# Altium PCB ums.PcbDoc (part 2 of 2)
Units mm, origin at the board's own origin, x right, y up, seen from the top; angles counter-clockwise.
Board outline 30 x 30 mm, 6 copper layers (Top, POWER, INNER_TOP, INNER_BOTTOM, GROUND, Bottom), stack 1.545 mm thick; 182 components, 122 nets, 559 pads, 122 vias.
Unrouted connection lines stored in the file: 144.
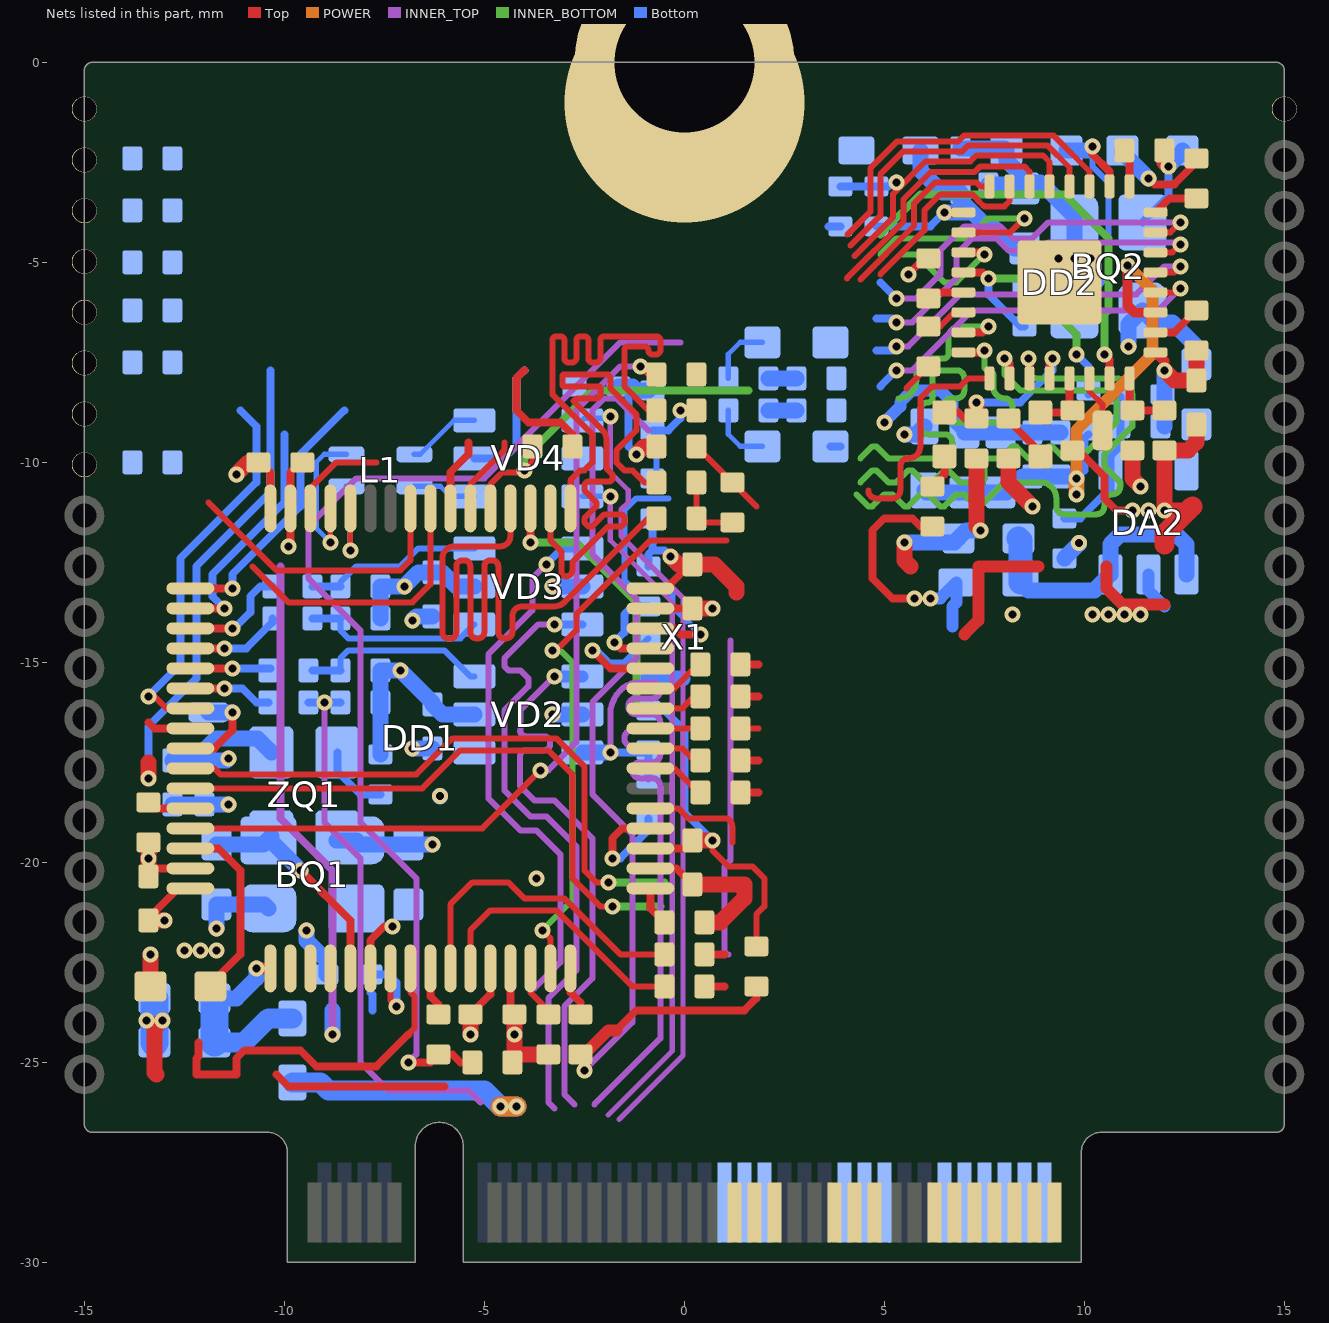
[diagram p6: the nets of this part, all layers, seen from the top]

## Via types
v1: diameter 0.4, hole 0.2, Top to Bottom, tented both sides, 121 vias
v2: diameter 0/0/0/0/0/6 (per signal layer), hole 0, Top to Bottom, 1 vias

## Nets (pads, with @x,y where several pads share a name; then routed paths per layer and width w, separated by ;. In a path a pad name is that pad's centre, name@x,y a point inside that pad or via, vN(x,y) a via of type N, cw(c..) or ccw(c..) an arc to the next point about the centre after c; other vN are vias at no path point)
1V0: C27.1 C28.2 C29.1 DA2.5 DD2.1 R68.1 R69.2 | length 3.6
  Top w0.25: DD2.1@11.78,-7.25 12,-7.47 v1(12,-7.7)
  Top w0.4: v1(12,-7.7) 12.25,-7.95 C28.2@12.8,-7.95 R69.2@12.8,-7.2
  Bottom w0.4: R68.1@12,-9.1 v1(12,-7.7)
1V0_FB: C27.2 DA2.4 R66.2 R68.2 | length 3.9
  Bottom w0.2: R66.2@9.5,-11.4 9.9,-11.4 10.65,-10.65 DA2.4@10.65,-10.2 10.65,-9.85 10.9,-9.6 R68.2@10.9,-9.1 10.9,-8.7 10.9,-8.35 C27.2@10.85,-8.3
3V3_FOR_1V: C26.1 DA2.1 DA2.3 L3.2 | length 7.2
  Bottom w0.4: L3.2@8.4,-13 8.6,-13.2 10.25,-13.2 DA2.3@10.65,-12.8 10.65,-12.05 10.9,-11.8 12.3,-11.8 12.55,-12.05 DA2.1@12.55,-12.8
  Bottom w0.6: C26.1@8.35,-11.9 8.4,-11.95 L3.2@8.4,-13
5V_EXT: TP2.1 VD1.2 X1.3 X1.4 X1.33 X1.34
12V_EXT: TP1.1 X1.22 X1.23
+3V3: C4.1 C37.2 C38.2 DA1.2 DA1.4 DD3.8 L2.2 L3.1 L4.2 L5.2 R3.2 R5.1 R8.2 R9.2 R45.1 R61.1 R78.2 R80.2 TP11.1 VD7.5 | length 18.2
  Top w0.2: v1(5.6,-5.3) 6,-4.9 R61.1@6.1,-4.9 ; v1(5.75,-13.4) 5.2,-13.4 4.7,-12.9 4.7,-11.7 5,-11.4 5.7,-11.4 5.9,-11.6 R9.2@6.2,-11.6
  Top w0.3: 10.55,-12.6 10.55,-13.15 10.95,-13.55 12,-13.55
  Top w0.4: R8.2@8.1,-9.9 8.1,-10.5 v1(8.7,-11.1) ; R45.1@11.2,-9.7 11.2,-10.4 v1(11.4,-10.6)
  INNER_BOTTOM w0.3: v1@6.143,-13.366 v1@6.153,-13.357
  POWER w0.5: v1(-4.6,-26.1) v1(-4.2,-26.1)
  Bottom w0.3: v1(6.15,-13.4) 6.4,-13.4 L3.1@6.8,-13 6.8,-13.5 6.7,-13.6 6.7,-14.1
  Bottom w0.4: v1(5.5,-9.3) 5.8,-9.3 L5.2@6,-9.1
  Bottom w0.5: L2.2@-9.8,-25.5 -9.1,-25.5 -8.9,-25.7 -5,-25.7 v1(-4.6,-26.1) v1(-4.2,-26.1)
  other v1: 10.2,-13.8 10.6,-13.8 11,-13.8 11.4,-13.8
+3V3MCU: C6.2 C7.2 C8.2 C9.1 C12.1 C13.2 C14.2 C17.2 C18.2 C19.2 C20.2 C21.2 DD1.1 DD1.13 DD1.19 DD1.32 DD1.48 DD1.64 L2.1 R6.2 R7.2 R11.2 R15.2 R16.2 R17.2 R18.2 R22.2 R27.2 R29.2 R37.2 R38.1 R47.1 TP34.1 VD2.5 VD3.5 VD4.5 ZQ1.4 | length 39.8
  Top w0.15: v1(0.7,-19.45) 0.7,-19.7 1.1,-20.1 1.7,-20.1 2,-20.4 2,-21.1 1.8,-21.3 R16.2@1.8,-22.1
  Top w0.2: C13.2@-13.4,-21.45 -13.4,-21.4 -12.65,-20.65 DD1.64@-12.35,-20.65 ; C19.2@-10.65,-10 -10.6,-10 -10.35,-10.25 DD1.48@-10.35,-11.15 ; DD1.13@-4.35,-22.65 -4.35,-23.7 C14.2@-4.25,-23.8 ; R18.2@-4.25,-24.95 R18.2@-4.1,-24.8 ; DD1.19@-0.85,-19.65 0,-19.65 C17.2@0.2,-19.45 ; DD1.32@-0.85,-13.15 -0.45,-13.15 0.15,-12.55 C18.2@0.2,-12.55
  Top w0.3: v1(-10.7,-22.65) DD1.1@-10.35,-22.65
  Top w0.4: C13.2@-13.4,-21.45 v1(-13,-21.45) ; v1(-11.2,-10.3) -10.9,-10 C19.2@-10.65,-10 ; R18.2@-4.3,-25 -4.25,-24.95 v1(-4.25,-24.3) C14.2@-4.25,-23.8 ; R18.2@-4.1,-24.8 R29.2@-3.4,-24.8 ; v1(-0.35,-12.35) -0.15,-12.55 C18.2@0.2,-12.55 0.75,-12.55 1.3,-13.1 1.3,-13.25 ; C17.2@0.2,-19.45 v1(0.7,-19.45)
  Bottom w0.2: R11.2@-0.9,-16.2 -0.5,-16.2 0,-16.7 0,-18.75 v1(0.7,-19.45) ; R27.2@-0.9,-12.6 -0.9,-12.3 -0.8,-12.2 ; R47.1@-0.8,-11.4 -0.8,-12.2 ; v1(-0.35,-12.35) -0.5,-12.2 -0.8,-12.2
  Bottom w0.4: R6.2@-16.2,2.1 R7.2@-15.2,2.1 ; C21.2@-12.8,-17.45 C20.2@-12,-17.45 ; C9.1@-11.75,-23.4 -11.2,-23.4 -10.7,-22.9 v1(-10.7,-22.65) ; v1(-11.4,-17.4) -11.45,-17.45 C20.2@-12,-17.45 ; ZQ1.4@-10.325,-17.25 -10.675,-16.9 -11.7,-16.9 -12,-17.2 C20.2@-12,-17.45 ; R38.1@-7.6,-17.3 R37.2@-7.6,-16 R22.2@-7.6,-15.2 v1(-7.1,-15.2) -6.3,-16 C6.2@-6.3,-16.05 -6.05,-16.3 VD2.5@-5.25,-16.3 ; R17.2@-7.6,-13.9 R15.2@-7.6,-13.1 v1(-7,-13.1) -6.65,-12.75 C7.2@-6.3,-12.75 -6.05,-12.75 -5.7,-13.1 VD3.5@-5.25,-13.1
  Bottom w0.5: C12.1@-11.75,-24.5 -11,-24.5 -10.4,-23.9 L2.1@-9.8,-23.9
  Bottom w0.7: C12.1@-11.75,-24.5 C9.1@-11.75,-23.4
  other v1: -12.5,-22.2 -12.1,-22.2 -11.7,-22.2
BOOT0: DD1.60 R34.2 | length 1.1
  Top w0.2: R34.2@-13.4,-18.5 -13.25,-18.65 DD1.60@-12.35,-18.65
BOOT1: DD1.28 R35.2 | length 3.4
  Top w0.2: v1(-2.3,-14.7) -1.85,-15.15 DD1.28@-0.85,-15.15
  Bottom w0.15: v1(-2.3,-14.7) -2.25,-14.75 -2.121,-14.75 -1.871,-15 -1.5,-15 R35.2@-0.9,-14.4
CLK: R15.1 R30.2 TP8.1 VD3.1 VD3.6 X1.6 | length 18
  INNER_TOP w0.15: -3.75,-23.15 -3.1,-22.5 -3.1,-19.8 -3.7,-19.2 -4.1,-19.2 -4.9,-18.4 -4.9,-14.8 -3.8,-13.7 -3.8,-12.9 v1(-3.45,-12.55)
  Bottom w0.15: R15.1@-8.6,-13.1 -8.6,-13 -8.2,-12.6 -7.1,-12.6 -6.65,-12.15 VD3.6@-5.25,-12.15
  Bottom w0.2: R30.2@-9.3,-13.1 R15.1@-8.6,-13.1 ; v1(-3.45,-12.55) -3.05,-12.15 VD3.1@-2.55,-12.15
CLK_R: DD1.51 R30.1 | length 2.7
  Top w0.2: DD1.51@-12.35,-14.15 v1(-11.3,-14.15)
  Bottom w0.2: v1(-11.3,-14.15) -11.25,-14.15 -10.85,-13.75 -10.85,-13.35 -10.6,-13.1 R30.1@-10.3,-13.1
D_N: L1.1 VD4.1 VD4.6 X1.11 | length 19.1
  INNER_TOP w0.13: -1.9,-26.318 -0.3,-24.718 -0.3,-13.5 -1.85,-11.95 v1(-1.85,-10.85)
  Bottom w0.13: L1.1@-6.75,-10.6 -6.1,-10.6 -5.85,-10.85 VD4.1@-5.25,-10.85 ; VD4.6@-2.55,-10.85 v1(-1.85,-10.85)
D_P: L1.4 VD4.3 VD4.4 X1.12 | length 21.7
  INNER_TOP w0.13: v1(-1.85,-8.85) -1.85,-10.25 -1.4,-10.7 -1.4,-11 -1.58,-11.18 -1.58,-11.838 -0.03,-13.388 -0.03,-24.83 -1.63,-26.43
  Bottom w0.13: L1.4@-6.75,-9.8 -6.6,-9.8 -5.75,-8.95 VD4.3@-5.25,-8.95 ; VD4.4@-2.55,-8.95 -2.5,-8.9 -1.9,-8.9 v1(-1.85,-8.85)
GND: BQ1.2 BQ1.4 BQ2.2 BQ2.4 C1.2 C2.1 C3.1 C4.2 C5.1 C6.1 C7.1 C8.1 C9.2 C10.1 C11.2 C12.2 C13.1 C14.1 C15.2 C16.1 C17.1 C18.1 C19.1 C20.1 C21.1 C22.2 C23.2 C26.2 C28.1 C29.2 C30.1 C31.1 C32.1 C33.1 C34.2 C35.2 C36.2 C37.1 C38.1 DA2.2 DD1.12 DD1.18 DD1.31 DD1.47 DD1.63 DD2.33 DD3.5 HL3.2 R2.1 R4.1 R28.2 R34.1 R35.1 R49.1 R50.2 R51.2 R52.2 R53.2 R62.1 R66.1 R67.2 R76.2 R77.2 R79.2 TP3.1 TP5.1 TP7.1 VD2.2 VD3.2 VD4.2 VD5.2 VD6.1 VD7.2 X1.1 X1.2 X1.10 X1.13 X1.20 X1.21 X1.31 X1.32 X1.76 ZQ1.2 | length 66.9
  Top w0.2: C13.1@-13.4,-20.35 -13.2,-20.15 DD1.63@-12.35,-20.15 ; v1(-9.9,-12.1) -9.85,-12.05 DD1.47@-9.85,-11.15 -9.85,-10.25 -9.6,-10 C19.1@-9.55,-10 ; C14.1@-5.35,-23.8 -4.85,-23.3 DD1.12@-4.85,-22.65 ; -4,-7.7 -4.2,-7.9 -4.2,-8.7 -3.9,-9 -3.1,-9 -2.8,-9.3 R49.1@-2.8,-9.6 ; DD1.18@-0.85,-20.15 -0.2,-20.15 C17.1@0.2,-20.55 ; DD1.31@-0.85,-13.65 C18.1@0.2,-13.65 ; R76.2@9.7,-9.7 9.85,-9.7 10.5,-10.35 10.5,-10.9 10.8,-11.2 v1(11.2,-11.2) ; v1(11.6,-2.9) 11.75,-3.05 12.25,-3.05 12.8,-2.5 R62.1@12.8,-2.4
  Top w0.4: C13.1@-13.4,-20.35 v1(-13.4,-19.9) R34.1@-13.4,-19.5 ; C11.2@-13.35,-23.1 v1(-13.35,-22.3) ; -13.2,-25.3 -13.25,-25.25 -13.25,-24.5 -13.25,-24.15 v1(-13.05,-23.95) ; v1(-5.35,-24.3) C14.1@-5.35,-23.8 ; v1(-1.2,-9.8) -1,-9.6 R77.2@-0.7,-9.6 ; C17.1@0.2,-20.5 0.25,-20.55 1.5,-20.55 1.5,-20.9 0.9,-21.5 R28.2@0.5,-21.5 ; C18.1@0.2,-13.65 v1(0.7,-13.65) ; v1(5.5,-12) 5.5,-12.45 5.65,-12.6 ; R67.2@7.3,-9.9 7.3,-11.6 v1(7.4,-11.7) ; 12.7,-11.1 cw(c12.6,-11.1) 12.6,-11.2 v1(12,-11.2) R50.2@12,-9.7 12.6,-9.7 12.8,-9.5 C28.1@12.8,-9.05
  Top w0.5: 12,-12.05 12,-11.8 12.6,-11.2 12.7,-11.1
  Bottom w0.2: VD4.2@-5.25,-9.9 -4.5,-9.9 -4.2,-9.6 -4.2,-7.9 -4,-7.7 ; C8.1@-1.4,-8.1 -1.4,-9.6 v1(-1.2,-9.8) ; 3.6,-4.1 R53.2@3.9,-4.1 ; R51.2@8.5,-5.6 8.8,-5.3 9,-5.3 9.35,-4.95 v1(9.35,-4.9)
  Bottom w0.3: v1(5,-9) 5.4,-8.6 5.4,-8.5 5.7,-8.2 6.4,-8.2 6.7,-8.5 6.7,-8.95 C36.2@7,-9.25 ; DA2.2@11.6,-12.8 11.6,-13.2 12,-13.6
  Bottom w0.4: C21.1@-12.8,-18.55 v1(-11.4,-18.55) ; v1(-11.699,-21.651) -11.7,-21.65 C15.2@-11.7,-21.05 -10.5,-21.05 BQ1.2@-10.4,-21.15 ; v1(-9.45,-21.7) -9.45,-21.95 -8.95,-22.45 C16.1@-8.95,-22.8 ; BQ1.4@-8.7,-19.45 BQ1.4@-8.2,-19.45 ; BQ1.4@-8.45,-19.45 BQ1.4@-8.2,-19.45 ; v1(-6.8,-17.15) C6.1@-6.3,-17.15 ; v1(-6.8,-13.95) -6.7,-13.85 C7.1@-6.3,-13.85 ; v1(-6.299,-19.553) -6.302,-19.55 -8.1,-19.55 BQ1.4@-8.2,-19.45 ; v1(-6.114,-18.339) v1@-6.103,-18.35 ; v1(-3.3,-16.3) VD2.2@-2.55,-16.3 ; v1(-3.3,-13.1) VD3.2@-2.55,-13.1 ; C8.1@-1.65,-8.1 -1.3,-8.1 -1.2,-8.2 R52.2@-0.9,-8.2 ; R35.1@-0.9,-15.4 -0.05,-15.4 ; v1(5.5,-12) 6.75,-12 C26.2@6.85,-11.9 7.05,-11.7 v1(7.4,-11.7) ; C31.1@6.9,-2.15 8,-2.15 C23.2@8.05,-2.2 8.05,-2.45 8.6,-3 8.9,-3 9.75,-3.85 BQ2.4@9.75,-4 9.75,-4.85 v1@9.8,-4.9 ; C36.2@7,-9.25 C34.2@7.9,-9.25 C30.1@9.4,-9.25 ; C33.1@7.6,-3.05 8.4,-3.05 C35.2@8.5,-3.15 ; R66.1@9.5,-12.4 9.864,-12.036 v1(9.864,-12.023) ; C22.2@10.95,-2.2 10.95,-2.25 v1(11.6,-2.9) ; v1(11.1,-7.1) 11.1,-6.55 BQ2.2@11.45,-6.2 11.75,-6.5 12.2,-6.5 12.8,-7.1 C29.2@12.8,-7.5
  Bottom w0.7: C12.2@-13.25,-24.5 -13.25,-23.95 C9.2@-13.25,-23.4
  other v1: -13.45,-23.95 -3.7,-20.4 11.6,-11.2 9.75,-4.9 10.15,-4.9
  other v2: 0,-1
GPIO1: DD2.32 R45.2 R50.1 | length 1.6
  Top w0.2: DD2.32@11.13,-7.9 11.13,-8.63 R45.2@11.2,-8.7 R50.1@12,-8.7
JTCK: DD1.49 R40.2 | length 6.7
  Top w0.2: DD1.49@-12.35,-13.15 v1(-11.3,-13.15) v1@-11.25,-13.15
  Bottom w0.2: v1(-11.3,-13.15) -11.3,-12.8 -9.6,-11.1 -9.6,-9.8 -8.5,-8.7
JTCK_R: R40.1 TP30.1
JTDI: DD1.50 R41.2 | length 6.1
  Top w0.2: DD1.50@-12.35,-13.65 v1(-11.5,-13.65) v1@-11.45,-13.65
  Bottom w0.2: v1(-11.5,-13.65) -11.8,-13.35 -11.8,-12.8 -10,-11 -10,-9.3
JTDI_R: R41.1 TP31.1
JTDO: DD1.55 R42.2 | length 9.6
  Top w0.15: v1(-13.4,-15.85) -13.25,-15.85 -12.95,-16.15 DD1.55@-12.35,-16.15
  Bottom w0.2: v1(-13.4,-15.85) -12.6,-15.05 -12.6,-12.4 -10.7,-10.5 -10.7,-9.1 -11.1,-8.7
JTDO_R: R42.1 TP32.1
JTMS: DD1.46 R39.2 | length 2.4
  Top w0.15: DD1.46@-9.35,-11.15 -9.35,-10.65 -8.7,-10 -7.7,-10
JTMS_R: R39.1 TP29.1
LED0: DD1.40 HL1.2 | length 7.1
  Top w0.15: HL1.2@-16.2,1.9 HL1.2@-16.2,2.05 ; -10.8,-12.6 -9.9,-13.5 -6.8,-13.5 -6.35,-13.05 DD1.40@-6.35,-11.15
LED0_R: HL1.1 R6.1 | length 0.7
  Top w0.4: v1(-16.2,2.75) HL1.1@-16.2,3.15
  Bottom w0.4: v1(-16.2,2.75) R6.1@-16.2,3.1
LED1: DD1.41 HL2.2 | length 7.2
  Top w0.15: -11.9,-11 -10.7,-12.2 -10.2,-12.7 -7.1,-12.7 -6.85,-12.45 DD1.41@-6.85,-11.15
LED1_R: HL2.1 R7.1 | length 0.7
  Top w0.4: v1(-15.2,2.75) HL2.1@-15.2,3.15
  Bottom w0.4: v1(-15.2,2.75) R7.1@-15.2,3.1
LED_G: DD2.29 HL4.2 R76.1 | length 1.6
  Top w0.2: HL4.2@8.9,-8.75 9.65,-8.75 R76.1@9.7,-8.7 9.63,-8.63 DD2.29@9.63,-7.9
LED_Y: DD2.28 HL5.2 R67.1 | length 4.3
  Top w0.2: HL5.2@6.5,-8.75 6.85,-8.75 7,-8.9 R67.1@7.3,-8.9 ; DD2.28@9.13,-7.9 9.13,-7.47 v1(9.2,-7.4)
  Top w0.4: R67.1@7.3,-8.9 v1(7.3,-8.5)
  Bottom w0.2: v1(7.3,-8.5) 8.4,-8.5 9.2,-7.7 v1(9.2,-7.4)
LEDG_R: HL4.1 R8.1 | length 1.3
  Top w0.2: R8.1@8.1,-8.9 8.1,-8.95 8.9,-9.75 HL4.1@8.9,-9.85
LEDY_R: HL5.1 R9.1 | length 0.9
  Top w0.2: R9.1@6.2,-10.6 6.5,-10.3 HL5.1@6.5,-9.85
MCU_OSC_IN: BQ1.3 C15.1 DD1.5 TP19.1 ZQ1.3 | length 5.6
  Top w0.2: v1(-9.599,-20.201) -8.35,-21.45 DD1.5@-8.35,-22.65
  Bottom w0.4: C15.1@-11.7,-19.55 -10.525,-19.55 ZQ1.3@-10.325,-19.35 -10.325,-19.475 v1(-9.599,-20.201)
MCU_OSC_OUT: BQ1.1 C10.2 DD1.6 | length 1.4
  Top w0.2: DD1.6@-7.85,-22.65 -7.85,-21.95 -7.5,-21.6 -7.3,-21.6 v1(-7.299,-21.601)
MCU_RST: C16.2 DD1.7 R44.2 | length 3.3
  Top w0.15: DD1.7@-7.35,-22.65 -7.35,-23.45 v1(-7.2,-23.6)
  Bottom w0.2: -7.8,-23.7 -7.8,-23.3 -7.85,-23.25 C16.2@-7.85,-22.8 -7.4,-22.8 -7.2,-23 v1(-7.2,-23.6)
MCU_RST_R: R44.1 TP35.1 | length 12.8
  INNER_TOP w0.2: -10.1,-12.6 -10.1,-18.9 -8.8,-20.2 v1(-8.8,-24.3)
  Bottom w0.4: v1(-8.8,-24.3) -8.8,-23.7
MCURXD0: DD1.24 R13.1 | length 1.2
  Top w0.15: DD1.24@-0.85,-17.15 -0.05,-17.15 R13.1@0.25,-17.45
MCURXD1: DD1.25 R19.1 | length 1.3
  Top w0.15: DD1.25@-0.85,-16.65 R19.1@0.4,-16.65
MCURXD2: DD1.26 R14.1 | length 1.4
  Top w0.15: DD1.26@-0.85,-16.15 -0.05,-16.15 0.25,-15.85 R14.1@0.4,-15.85
MCURXD3: DD1.27 R20.1 | length 1.5
  Top w0.15: DD1.27@-0.85,-15.65 -0.25,-15.65 0.35,-15.05 R20.1@0.4,-15.05
MCURXDV: DD1.23 R21.1 | length 1.5
  Top w0.15: DD1.23@-0.9,-17.65 -0.25,-17.65 R21.1@0.35,-18.25
MDC: DD2.12 R18.1 R24.2 TP15.1 | length 35.4
  Top w0.15: 4.151,-4.585 4.9,-3.836 4.9,-2.8 5.475,-2.225 6.95,-2.225 7.1,-2.075 9.075,-2.075 9.63,-2.63 DD2.12@9.63,-3.1
  Top w0.2: v1(-6.9,-25) -6.35,-25 R24.2@-6.15,-24.8 -5.8,-24.8 -5.6,-25 R18.1@-5.3,-25
  INNER_TOP w0.15: v1(-6.9,-25) -6.7,-24.8 -6.7,-20.4 -8.1,-19 -8.1,-14.2 -9.4,-12.9 -9.4,-11.6 -8.2,-10.4 -5,-10.4 -1.6,-7 -0.1,-7
MDC_R: DD1.9 R24.1 | length 1.2
  Top w0.2: DD1.9@-6.35,-22.65 -6.35,-23.35 -6.15,-23.55 R24.1@-6.15,-23.8
MDIO: DD2.11 R16.1 R31.2 TP14.1 | length 34.4
  Top w0.15: 4.083,-4.3 4.65,-3.733 4.65,-2.65 5.325,-1.975 6.846,-1.975 6.996,-1.825 9.225,-1.825 10.13,-2.73 DD2.11@10.13,-3.1
  Top w0.2: R31.2@-2.6,-24.8 R31.2@-2.5,-24.9 ; -1.7,-24.2 -1.2,-23.7 1.5,-23.7 1.8,-23.4 R16.1@1.8,-23.1
  Top w0.3: R31.2@-2.6,-24.8 -2.5,-24.8 -1.9,-24.2 -1.7,-24.2 ; v1(-2.5,-25.2) R31.2@-2.5,-24.9
  INNER_TOP w0.15: v1(-2.5,-25.2) -1.3,-24 -1.3,-19.3 -2.3,-18.3 -2.3,-16 -1.2,-14.9 -1.2,-13.4 -2.3,-12.3 -2.3,-8.7 -2,-8.4 -1.7,-8.4 -0.9,-9.2
MDIO_R: DD1.16 R31.1 | length 1.3
  Top w0.2: DD1.16@-2.85,-22.65 -2.85,-23.25 -2.6,-23.5 R31.1@-2.6,-23.8
MISO: R17.1 R32.2 TP4.1 VD3.3 VD3.4 X1.7 | length 20.1
  INNER_TOP w0.15: -3.25,-26.15 -3.4,-26 -3.4,-23.4 -2.7,-22.7 -2.7,-19.6 -3.45,-18.85 -3.85,-18.85 -4.5,-18.2 -4.5,-16.2 -3.9,-15.6 -3.9,-15.4 -4.1,-15.2 -4.4,-15.2 -4.5,-15.1 -4.5,-14.9 -3.65,-14.05 v1(-3.25,-14.05)
  Bottom w0.15: R17.1@-8.6,-13.9 -8.6,-14.2 -8.4,-14.4 -5.6,-14.4 VD3.4@-5.25,-14.05
  Bottom w0.2: R32.2@-9.3,-13.9 R17.1@-8.6,-13.9 ; v1(-3.25,-14.05) VD3.3@-2.55,-14.05
MISO_R: DD1.52 R32.1 | length 2.4
  Top w0.2: DD1.52@-12.35,-14.65 v1(-11.5,-14.65)
  Bottom w0.2: v1(-11.5,-14.65) -10.95,-14.65 -10.3,-14 R32.1@-10.3,-13.9
MOSI: R22.1 R25.2 TP6.1 VD2.1 VD2.6 X1.8 | length 19.1
  INNER_TOP w0.15: v1(-3.25,-15.35) -4.1,-16.2 -4.1,-16.694 -4.106,-16.7 ccw(c-3.956,-16.7) -3.956,-16.85 -3.506,-16.85 cw(c-3.506,-17) -3.356,-17 -3.356,-17.05 cw(c-3.506,-17.05) -3.506,-17.2 -3.956,-17.2 ccw(c-3.956,-17.35) -4.106,-17.35 -4.106,-18.094 -3.75,-18.45 -3.25,-18.45 -2.3,-19.4 -2.3,-22.9 -3,-23.6 -3,-25.8 -2.75,-26.05
  Bottom w0.15: R22.1@-8.6,-15.2 -8.6,-14.9 -8.4,-14.7 -6,-14.7 -5.35,-15.35 VD2.6@-5.25,-15.35
  Bottom w0.2: R25.2@-9.3,-15.2 R22.1@-8.6,-15.2
  Bottom w0.3: v1(-3.25,-15.35) VD2.1@-2.55,-15.35
MOSI_R: DD1.53 R25.1 | length 2
  Top w0.2: DD1.53@-12.35,-15.15 v1(-11.3,-15.15)
  Bottom w0.2: v1(-11.3,-15.15) R25.1@-10.35,-15.15
N_MID: R72.2 R75.1 | length 0.7
  Bottom w0.4: R75.1@2.1,-7.9 R72.2@2.8,-7.9
NJTRST: DD1.56 R43.2 | length 1.1
  Top w0.2: -13.4,-16.5 -13.25,-16.65 DD1.56@-12.35,-16.65
NJTRST_R: R43.1 TP33.1 | length 11.9
  Top w0.4: v1(-13.4,-17.9) -13.4,-17.5
  Bottom w0.2: v1(-13.4,-17.9) -13.4,-16.6 -12.2,-15.4 -12.2,-12.6 -10.35,-10.75 -10.35,-7.7
P_MID: R71.2 R74.1 | length 0.7
  Bottom w0.4: R74.1@2.1,-8.7 R71.2@2.8,-8.7
PHY_ADR1: DD2.20 R46.2 R51.1 | length 6.7
  Top w0.2: DD2.20@6.98,-5.25 7.45,-5.25 v1(7.6,-5.4)
  INNER_BOTTOM w0.2: v1(7.6,-5.4) 8.4,-5.4 9.8,-6.8 v1(9.8,-7.3)
  Bottom w0.2: v1(7.6,-5.4) 7.6,-5.8 8.4,-6.6 R51.1@8.5,-6.6 ; v1(9.8,-7.3) 10.1,-7.6 R46.2@10.1,-8.3
PHY_CEXT: DD2.2 R69.1 | length 1.2
  Top w0.2: DD2.2@11.78,-6.75 12.25,-6.75 R69.1@12.8,-6.2
PHY_GPIO2: DD2.8 R62.2 | length 1.2
  Top w0.2: DD2.8@11.78,-3.75 12.13,-3.4 R62.2@12.8,-3.4
PHY_PWDN: DD2.21 R61.2 | length 0.9
  Top w0.2: R61.2@6.1,-5.9 6.25,-5.75 DD2.21@6.98,-5.75
PHY_RXC: DD2.19 R57.2 | length 3.7
  Top w0.2: R57.2@0.5,-23.1 1,-23.1 ; DD2.19@6.98,-4.75 7.45,-4.75 v1(7.5,-4.8)
  INNER_BOTTOM w0.15: 5.4,-4.8 5.8,-4.8 6.5,-5.5 6.8,-5.5 v1(7.5,-4.8)
PHY_RXD0: DD2.16 R47.2 R52.1 R59.2 | length 7.1
  Top w0.15: R59.2@0.3,-8.7 R59.2@0.4,-8.7 ; 4.4,-5.432 5.74,-4.092 5.74,-3.536 6.276,-3 7.3,-3 7.4,-3.1 DD2.16@7.63,-3.1
  Top w0.2: v1(-0.1,-8.7) R59.2@0.3,-8.7
  Bottom w0.15: R47.2@-0.7,-10.4 R52.1@-0.7,-9.2
  Bottom w0.2: R52.1@-0.8,-9.2 -0.7,-9.2 -0.4,-9.2 -0.1,-8.9
PHY_RXD1: DD2.15 R54.2 R77.1 | length 7
  Top w0.15: R77.1@0.3,-9.6 R54.2@1.2,-10.5 1.8,-11.1 ; 4.9,-5.3 6,-4.2 6,-3.7 6.4,-3.3 7.2,-3.3 7.325,-3.425 7.325,-3.438 7.467,-3.58 7.48,-3.58 7.5,-3.6 8,-3.6 8.13,-3.47 DD2.15@8.13,-3.1
PHY_RXD2: DD2.14 R60.2 | length 15
  Top w0.15: 4.065,-5.4 5.48,-3.985 5.48,-3.428 6.168,-2.74 7.26,-2.74 7.4,-2.6 8.5,-2.6 8.63,-2.73 DD2.14@8.63,-3.1
  Top w0.2: R60.2@0.5,-22.3 1,-22.3
  INNER_TOP w0.15: 1.1,-22.3 1,-22.3 1,-20.1 1.15,-19.95 1.15,-14.45
PHY_RXD3: DD2.13 R48.2 R53.1 R55.2 | length 8.4
  Top w0.15: 4.257,-4.84 5.22,-3.877 5.22,-3.288 6.028,-2.48 7.15,-2.48 7.3,-2.33 8.97,-2.33 9.13,-2.491 DD2.13@9.13,-3.1
  Bottom w0.2: R53.1@3.9,-3.1 5.1,-3.1 v1@5.3,-2.9
  other v1: 5.3,-3
PHY_RXDV: DD2.18 R56.2 | length 5.6
  Top w0.15: DD2.18@6.98,-4.25 8.15,-4.25 v1(8.5,-3.9)
  INNER_BOTTOM w0.15: 4.9,-4.8 5.3,-4.4 7.1,-4.4 7.6,-3.9 v1(8.5,-3.9)
PHY_RXN: DD2.6 R72.1 | length 9.8
  Top w0.15: DD2.6@11.78,-4.75 12.2,-4.75 v1(12.4,-4.55)
  INNER_TOP w0.15: v1(5.3,-6.5) 5.7,-6.5 6.8,-5.4 6.8,-4.8 7.2,-4.4 7.8,-4.4 8.1,-4.7 8.9,-4.7 9.1,-4.5 12.35,-4.5 v1(12.4,-4.55)
  Bottom w0.2: 4.8,-6.4 5.2,-6.4 v1(5.3,-6.5)
PHY_RXP: DD2.5 R71.1 | length 9.2
  Top w0.15: DD2.5@11.78,-5.25 12.25,-5.25 v1(12.4,-5.1)
  INNER_TOP w0.15: v1(5.3,-7.1) 5.6,-7.1 6.9,-5.8 11.3,-5.8 12,-5.1 v1(12.4,-5.1)
  Bottom w0.2: 4.8,-7.2 5.2,-7.2 v1(5.3,-7.1)
PHY_TXC: DD2.22 R58.2 | length 1
  Top w0.15: R58.2@6.1,-6.6 6.4,-6.6 6.75,-6.25 DD2.22@6.98,-6.25
PHY_TXN: DD2.7 R73.1 | length 9.8
  Top w0.15: DD2.7@11.78,-4.25 12.15,-4.25 v1(12.4,-4)
  INNER_TOP w0.15: v1(5.3,-5.9) 5.8,-5.9 6.4,-5.3 6.4,-4.7 7,-4.1 7.9,-4.1 8.2,-4.4 8.7,-4.4 9.1,-4 v1(12.4,-4)
  Bottom w0.2: 4.9,-5.5 v1(5.3,-5.9)
PHY_TXP: DD2.4 R70.1 | length 9.4
  Top w0.15: DD2.4@11.78,-5.75 12.3,-5.75 v1(12.4,-5.65)
  INNER_TOP w0.15: v1(5.3,-7.7) 5.7,-7.7 7.2,-6.2 11.85,-6.2 v1(12.4,-5.65)
  Bottom w0.2: R70.1@3.65,-9.6 R70.1@3.9,-9.6 ; 4.9,-8.1 v1(5.3,-7.7)
PS_ADJ: DA1.1 R3.1 R4.2 | length 3.3
  Top w0.3: 7,-14.3 7.35,-13.95 7.35,-12.6 8.85,-12.6
PS_IN: C1.1 C2.2 DA1.3 R1.2 VD1.1 | length 4.3
  Top w0.2: -10.2,-25.3 -9.9,-25.6 -6,-25.6
PS_LED: HL3.1 R5.2
RS485_A: L6.2 R81.2 X1.29
RS485_A_L: DD3.6 L6.1 R80.1 VD7.1 VD7.6
RS485_B: L7.2 R81.1 X1.30
RS485_B_L: DD3.7 L7.1 R79.1 VD7.3 VD7.4
RST_PHY: DD1.37 DD2.31 R49.2 | length 19
  Top w0.15: DD1.37@-4.85,-11.15 -4.85,-10.55 -4.55,-10.25 -4.05,-10.25 v1(-4,-10.2) -3.8,-10 R49.2@-3.8,-9.6
  Top w0.2: v1(10.5,-7.3) 10.63,-7.43 DD2.31@10.63,-7.9
  INNER_BOTTOM w0.2: v1(-4,-10.2) -4,-9.9 -2.3,-8.2 -1.2,-8.2 1.6,-8.2 ; 4.9,-4.3 5.9,-3.3 9.5,-3.3 10.6,-4.4 10.6,-6.2 10.5,-6.3 v1(10.5,-7.3)
RXC: DD1.15 R58.1 | length 15.3
  Top w0.15: v1@-3.65,-21.75 v1@-3.65,-21.7 ; v1(-3.55,-21.7) -3.35,-21.9 -3.35,-22.05 DD1.15@-3.35,-22.65 ; v1(-3.3,-14.7) -3.2,-14.7 -2.7,-14.2 -2.7,-13.8 -0.85,-11.95 1.05,-11.95 ; 5.55,-8.15 R58.1@6.1,-7.6
  INNER_BOTTOM w0.15: v1@-3.65,-21.7 v1@-3.65,-21.65 ; v1(-3.55,-21.7) -2.8,-20.95 -2.8,-20.866 -2.8,-15 -3.1,-14.7 v1(-3.3,-14.7)
RXD0: DD2.24 R13.2 | length 12.4
  Top w0.2: R13.2@1.4,-17.45 1.85,-17.45 ; DD2.24@6.98,-7.25 7.45,-7.25 v1(7.5,-7.2)
  INNER_BOTTOM w0.15: 4.4,-9.9 4.7,-9.6 4.8,-9.6 5.1,-9.9 6.5,-9.9 ccw(c6.5,-9.7) 6.7,-9.7 6.7,-9.5 ccw(c6.5,-9.5) 6.5,-9.3 6.1,-9.3 cw(c6.1,-9.1) 5.9,-9.1 5.9,-8.7 cw(c6.1,-8.7) 6.1,-8.5 ccw(c6.1,-8.4) 6.2,-8.4 6.2,-7.9 cw(c6.4,-7.9) 6.4,-7.7 6.8,-7.7 cw(c6.8,-7.9) 7,-7.9 7,-8.2 cw(c6.8,-8.2) 6.8,-8.4 6.7,-8.4 ccw(c6.7,-8.6) 6.5,-8.6 6.5,-8.8 ccw(c6.7,-8.8) 6.7,-9 7.9,-9 ccw(c7.9,-8.7) 8.2,-8.7 8.2,-8.6 ccw(c8,-8.6) 8,-8.4 cw(c8,-8.125) 7.725,-8.125 7.725,-7.825 ccw(c7.6,-7.825) 7.6,-7.7 cw(c7.6,-7.6) 7.5,-7.6 v1(7.5,-7.2)
RXD1: DD2.25 R19.2 | length 6
  Top w0.15: R19.2@1.4,-16.65 1.85,-16.65 ; 4.6,-10.7 ccw(c4.8,-10.7) 4.8,-10.9 5.2,-10.9 ccw(c5.2,-10.7) 5.4,-10.7 5.4,-10.1 cw(c5.6,-10.1) 5.6,-9.9 ccw(c5.6,-9.6) 5.9,-9.6 5.9,-8.4 6.2,-8.1 6.9,-8.1 7.1,-7.9 DD2.25@7.63,-7.9
RXD2: DD2.26 R14.2 | length 13.6
  Top w0.2: R14.2@1.4,-15.85 1.85,-15.85 ; v1(8,-7.4) 8.13,-7.53 DD2.26@8.13,-7.9
  INNER_BOTTOM w0.15: 4.4,-10.5 4.7,-10.2 4.8,-10.2 5.1,-10.5 5.3,-10.5 5.6,-10.2 5.7,-10.2 6,-10.5 6.2,-10.5 6.5,-10.2 6.6,-10.2 6.9,-10.5 7.4,-10.5 ccw(c7.4,-10.4) 7.5,-10.4 7.5,-9.976 cw(c7.571,-9.976) 7.571,-9.905 7.9,-9.905 8.2,-9.605 8.3,-9.605 8.6,-9.905 8.8,-9.905 9.1,-9.605 9.2,-9.605 9.5,-9.905 9.895,-9.905 10.1,-9.7 10.8,-9 10.8,-8.5 ccw(c10.5,-8.5) 10.5,-8.2 8.4,-8.2 8,-7.8 v1(8,-7.4)
RXD3: DD2.27 R20.2 | length 15.7
  Top w0.2: R20.2@1.4,-15.05 1.85,-15.05 ; v1(8.6,-7.4) 8.63,-7.43 DD2.27@8.63,-7.9
  INNER_BOTTOM w0.15: 4.3,-10.8 4.6,-11.1 4.7,-11.1 5,-10.8 5.2,-10.8 5.5,-11.1 5.6,-11.1 5.9,-10.8 6.1,-10.8 6.4,-11.1 6.5,-11.1 6.8,-10.8 7,-10.8 7.3,-11.1 7.4,-11.1 8,-10.5 8.9,-10.5 cw(c8.9,-10.9) 9.3,-10.9 9.3,-11.1 ccw(c9.5,-11.1) 9.5,-11.3 10.3,-11.3 ccw(c10.3,-11.1) 10.5,-11.1 10.5,-11 cw(c10.7,-11) 10.7,-10.8 ccw(c10.7,-10.6) 10.9,-10.6 10.9,-10.5 10.5,-10.1 10.5,-9.8 11.2,-9.1 11.2,-8.3 ccw(c10.8,-8.3) 10.8,-7.9 8.8,-7.9 cw(c8.8,-7.7) 8.6,-7.7 v1(8.6,-7.4)
RXDV: DD2.23 R21.2 | length 4.7
  Top w0.2: R21.2@1.4,-18.25 1.85,-18.25 ; DD2.23@6.98,-6.75 7.45,-6.75 v1(7.6,-6.6)
  INNER_BOTTOM w0.15: 5.35,-8.4 ccw(c5.35,-7.95) 5.8,-7.95 5.8,-7.7 cw(c6.1,-7.7) 6.1,-7.4 6.5,-7.4 ccw(c6.5,-7.3) 6.6,-7.3 6.6,-6.9 cw(c6.9,-6.9) 6.9,-6.6 7.3,-6.6 v1(7.6,-6.6)
RZRV_01: DD1.2 TP22.1
RZRV_02: DD1.39 TP23.1 | length 1.8
  Top w0.2: DD1.39@-5.85,-11.15 -5.85,-10.25 -5.4,-9.8 -5.4,-9.5
RZRV_03: DD1.38 TP24.1 | length 2
  Top w0.15: DD1.38@-5.35,-11.15 -5.35,-10.55 -4.5,-9.7 -4.5,-9.5
RZRV_CLKOUT: DD2.30 TP26.1 | length 1.4
  Top w0.15: DD2.30@10.13,-7.9 10.13,-8.23 10.45,-8.55 TP26.1@10.45,-9.2
RZRV_COL: DD1.17 R28.1 | length 1
  Top w0.2: DD1.17@-0.85,-20.65 -0.85,-21.15 R28.1@-0.5,-21.5
RZRV_CRS_WKUP: DD1.14 R29.1 | length 1.3
  Top w0.15: DD1.14@-3.85,-22.65 -3.85,-23.25 -3.4,-23.7 R29.1@-3.4,-23.8
RZRV_OSC32_IN: DD1.3 TP20.1
RZRV_OSC32_OUT: DD1.4 TP21.1
RZRV_PPS_OUT: DD1.57 TP16.1 | length 2.3
  Top w0.2: DD1.57@-12.35,-17.15 -11.75,-17.15 -11.3,-16.7 v1(-11.3,-16.25)
  Bottom w0.4: TP16.1@-11.9,-16.25 v1(-11.3,-16.25)
RZRV_RX_ER: DD1.29 R27.1 | length 2.4
  Top w0.2: v1(-1.75,-14.5) -1.6,-14.65 DD1.29@-0.85,-14.65
  Bottom w0.2: v1(-1.75,-14.5) -1.5,-14.25 -1.5,-13.8 -1.3,-13.6 R27.1@-0.9,-13.6
SPE_DATA_C_N: C25.2 R64.2 TP13.1 X1.19
SPE_DATA_C_P: C24.2 R63.2 TP12.1 X1.18
SPE_DATA_N: C25.1 R64.1 R73.2 R75.2 VD6.2 | length 1.6
  Bottom w0.13: R75.2@1.1,-7.9 1.1,-7.3 1.4,-7 R73.2@1.95,-7
SPE_DATA_P: C24.1 R63.1 R70.2 R74.2 VD5.1 | length 1.6
  Bottom w0.13: R74.2@1.1,-8.7 1.1,-9.3 1.4,-9.6 R70.2@1.95,-9.6
SPE_VDDA: C30.2 C32.2 C34.1 C36.1 DD2.3 L5.1 R46.1 TP27.1 | length 14.6
  Top w0.25: v1(11.085,-5.082) 11.085,-6.085 11.25,-6.25 DD2.3@11.78,-6.25
  POWER w0.3: v1(9.8,-10.4) 9.8,-9.2 11.7,-7.3 11.7,-5.697 v1(11.085,-5.082)
  POWER w0.4: v1@9.8,-10.7 v1(9.8,-10.4)
  Bottom w0.2: v1(9.8,-10.4) 10,-10.2 10,-9.4 R46.1@10.1,-9.3
  Bottom w0.4: L5.1@6,-10.7 L5.1@6.05,-10.75 ; v1(9.8,-10.4) 9.75,-10.35 C32.2@8.7,-10.35 8.45,-10.35 8.05,-10.75 C36.1@7,-10.75 ; L5.1@6.05,-10.75 C36.1@7,-10.75 ; L5.1@6.05,-10.75 C36.1@7,-10.75
  other v1: 9.8,-10.8
SPE_VDDIO: C31.2 C33.2 C35.1 DD2.17 L4.1 R48.1 TP28.1 | length 7
  Top w0.25: v1(6.5,-3.75) DD2.17@6.98,-3.75
  Bottom w0.2: R48.1@4.8,-4.1 6.15,-4.1 v1(6.5,-3.75)
  Bottom w0.4: L4.1@5.9,-2.2 5.9,-2.7 6.45,-3.25 C31.2@6.9,-3.25 6.9,-3.45 7.175,-3.725 ; v1(6.5,-3.75) 7.15,-3.75 7.175,-3.725 ; C35.1@8.5,-4.65 8.25,-4.65 7.75,-4.15 C33.2@7.6,-4.15 7.175,-3.725
SPE_XI: BQ2.3 C23.1 DD2.10 | length 6.5
  Top w0.2: v1(10.2,-2.1) 10.2,-2.3 10.63,-2.73 DD2.10@10.63,-3.1
  Bottom w0.15: BQ2.3@9.75,-6.2 10.6,-5.35 10.6,-3 10.2,-2.6 v1(10.2,-2.1)
  Bottom w0.4: C23.1@9.55,-2.2 10.1,-2.2 v1(10.2,-2.1)
SPE_XO: BQ2.1 C22.1 R65.1 TP25.1 | length 2.7
  Top w0.4: R65.1@12,-2.2 12,-2.5 v1(12.1,-2.6)
  Bottom w0.2: BQ2.1@11.45,-4 12.1,-3.35 v1(12.1,-2.6)
  Bottom w0.4: v1(12.1,-2.6) 12.45,-2.25 C22.1@12.45,-2.2
SPE_XO_R: DD2.9 R65.2 | length 1
  Top w0.2: R65.2@11,-2.2 11.13,-2.33 DD2.9@11.13,-3.1
STBY: R38.2 ZQ1.1 | length 1.8
  Bottom w0.2: ZQ1.1@-8.675,-17.25 -8.675,-17.725 -8.1,-18.3 R38.2@-7.6,-18.3
TXC: DD1.11 R57.1 | length 6.8
  Top w0.15: DD1.11@-5.35,-22.65 -5.35,-21.95 -5.35,-21.7 -4.85,-21.2 -3.2,-21.2 -1.3,-23.1 R57.1@-0.5,-23.1
TXD0: DD1.33 R59.1 | length 13.3
  Top w0.15: DD1.33@-2.85,-11.15 -2.85,-10.45 -2.6,-10.2 -2.5,-10.2 -2.3,-10 -2.3,-9.3 -3.3,-8.3 -3.3,-6.95 cw(c-3.2,-6.95) -3.2,-6.85 -3.1,-6.85 cw(c-3.1,-6.95) -3,-6.95 -3,-7.4 ccw(c-2.9,-7.4) -2.9,-7.5 -2.8,-7.5 ccw(c-2.8,-7.4) -2.7,-7.4 -2.7,-6.95 cw(c-2.6,-6.95) -2.6,-6.85 -2.5,-6.85 cw(c-2.5,-6.95) -2.4,-6.95 -2.4,-7.4 ccw(c-2.3,-7.4) -2.3,-7.5 -2.2,-7.5 ccw(c-2.2,-7.4) -2.1,-7.4 -2.1,-6.95 cw(c-2,-6.95) -2,-6.85 -0.7,-6.85 cw(c-0.7,-6.95) -0.6,-6.95 -0.6,-7.2 cw(c-0.7,-7.2) -0.7,-7.3 -0.8,-7.3 cw(c-0.8,-7.2) -0.9,-7.2 ccw(c-1,-7.2) -1,-7.1 -1.4,-7.1 ccw(c-1.4,-7.2) -1.5,-7.2 -1.5,-8.1 -0.9,-8.7 R59.1@-0.7,-8.7
TXD1: R23.1 R26.1 R54.1 | length 1.8
  Top w0.15: R26.1@0.3,-10.5 R23.1@0.3,-11.4 0.4,-11.5 R54.1@1.2,-11.5
TXD1_H563: DD1.36 R23.2 | length 18.8
  Top w0.15: DD1.36@-4.35,-11.15 -4.35,-11.85 cw(c-4.6,-11.85) -4.6,-12.1 -5.75,-12.1 ccw(c-5.75,-12.4) -6.05,-12.4 -6.05,-14.254 ccw(c-5.9,-14.254) -5.9,-14.404 -5.85,-14.404 ccw(c-5.85,-14.254) -5.7,-14.254 -5.7,-12.6 cw(c-5.55,-12.6) -5.55,-12.45 -5.5,-12.45 cw(c-5.5,-12.6) -5.35,-12.6 -5.35,-14.25 ccw(c-5.2,-14.25) -5.2,-14.4 -5.15,-14.4 ccw(c-5.15,-14.25) -5,-14.25 -5,-12.6 cw(c-4.85,-12.6) -4.85,-12.45 -4.8,-12.45 cw(c-4.8,-12.6) -4.65,-12.6 -4.65,-14.25 ccw(c-4.5,-14.25) -4.5,-14.4 -4.45,-14.4 ccw(c-4.45,-14.25) -4.3,-14.25 -4.3,-13.85 cw(c-4.05,-13.85) -4.05,-13.6 ; -4,-13.6 -3.241,-13.6 ccw(c-3.241,-13.259) -3,-13.5 -0.9,-11.4 R23.2@-0.7,-11.4
TXD1_R: DD1.34 R26.2 | length 16.8
  Top w0.15: DD1.34@-3.35,-11.15 -3.35,-11.95 -3.075,-12.225 -3.075,-12.725 ccw(c-2.95,-12.725) -2.95,-12.85 ccw(c-2.95,-12.7) -2.8,-12.7 -2.8,-12.5 -1.9,-11.6 -1.6,-11.6 ccw(c-1.6,-11.5) -1.5,-11.5 -1.5,-11.4 ccw(c-1.6,-11.4) -1.6,-11.3 -2,-11.3 -2.3,-11.6 -2.4,-11.6 -2.5,-11.5 -2.5,-11.4 -2.2,-11.1 -2.2,-11 -2.5,-10.7 -2.5,-10.6 cw(c-2.375,-10.6) -2.375,-10.475 -1.875,-10.475 ccw(c-1.875,-10.4) -1.8,-10.4 -1.8,-10.3 -1.95,-10.15 -1.95,-9.416 ccw(c-2.255,-9.416) -2.039,-9.2 -2.77,-8.47 -2.7,-8.4 -2.2,-8.4 ccw(c-2.2,-8.3) -2.1,-8.3 -2.1,-8.15 ccw(c-2.15,-8.15) -2.15,-8.1 -3,-8.1 cw(c-3,-8.055) -3.045,-8.055 -3.045,-7.845 cw(c-3,-7.845) -3,-7.8 -1.95,-7.8 cw(c-1.95,-7.9) -1.85,-7.9 -1.85,-8.15 -1.2,-8.8 -1.2,-9.2 -1.7,-9.7 -1.7,-10 -1.5,-10.2 -1.3,-10.2 -1,-10.5 R26.2@-0.7,-10.5
TXD2: DD1.10 R60.1 | length 8
  Top w0.15: DD1.10@-5.85,-22.65 -5.85,-22.05 -5.85,-21.05 -5.3,-20.5 -4.4,-20.5 -4,-20.9 ; R60.1@-0.5,-22.3 -1.6,-22.3 -3,-20.9 -3.45,-20.9 -3.9,-20.9 ; -4,-20.9 -3.9,-20.9 ; -4,-20.9 -3.9,-20.9
TXD3: DD1.61 R55.1 | length 21.4
  Top w0.15: DD1.61@-12.35,-19.15 -5.05,-19.15 v1(-3.6,-17.7) ; v1(-1.1,-7.6) -0.9,-7.8 R55.1@-0.7,-7.8
  INNER_TOP w0.15: v1(-3.6,-17.7) -3.4,-17.7 -2.7,-17 -2.7,-8.7 -1.6,-7.6 v1(-1.1,-7.6)
TXEN: R10.1 R12.1 R56.1
TXEN_H563: DD1.21 R10.2 | length 2.7
  Top w0.15: DD1.21@-0.85,-18.65 -0.15,-18.65 0.1,-18.9 1,-18.9 cw(c1,-19.1) 1.2,-19.1 1.2,-19.5
TXEN_R/VCAP1_H563: C5.2 DD1.30 R12.2 | length 7
  Top w0.2: DD1.30@-0.85,-14.15 -0.25,-14.15 -0.1,-14.3 v1(0.4,-14.3)
  Bottom w0.15: -0.4,-10.9 -1.2,-10.9 -1.5,-11.2 -1.5,-12.95 -1.35,-13.1 -0.5,-13.1 -0.3,-13.3 -0.3,-13.6 v1(0.4,-14.3)
  Bottom w0.2: v1@0.4,-14.35 v1(0.4,-14.3)
UART_DE: DD1.35 DD3.2 DD3.3 R78.1 | length 6.8
  Top w0.2: v1(-3.85,-12) DD1.35@-3.85,-11.15
  INNER_BOTTOM w0.2: v1(-3.85,-12) -2.7,-12 -1.2,-13.5 -1.2,-16.2
  other v1: 8.2,-13.8
UART_RX: DD1.59 DD3.1 TP17.1 | length 15.3
  Top w0.15: DD1.59@-12.35,-18.15 -6.55,-18.15 -5.6,-17.2 -3.4,-17.2 -2.8,-17.8 -2.8,-20.4 -2.1,-21.1 v1(-1.8,-21.1)
  INNER_BOTTOM w0.2: v1(-1.8,-21.1) -0.6,-21.1
UART_TX: DD1.58 DD3.4 TP18.1 | length 15.3
  Top w0.15: DD1.58@-12.35,-17.65 -11.75,-17.65 -11.6,-17.8 -6.7,-17.8 -5.8,-16.9 -3.2,-16.9 -2.5,-17.6 -2.5,-20.2 -2.2,-20.5 v1(-1.9,-20.5)
  INNER_BOTTOM w0.2: v1(-1.9,-20.5) -0.5,-20.5
USB_N: DD1.44 L1.2 | length 2.7
  Top w0.13: v1(-8.35,-12.2) DD1.44@-8.35,-11.15
  Bottom w0.13: L1.2@-8.45,-10.6 -8.35,-10.7 v1(-8.35,-12.2)
USB_P: DD1.45 L1.3 | length 3.8
  Top w0.13: v1(-8.85,-12) DD1.45@-8.85,-11.15
  Bottom w0.13: v1(-8.85,-12) -9.2,-11.65 -9.2,-10 -9,-9.8 L1.3@-8.45,-9.8
VCAP2_H563: C11.1 DD1.62 | length 4.7
  Top w0.2: DD1.62@-12.35,-19.65 -11.65,-19.65 -11.1,-20.2 -11.1,-22.3 -11.85,-23.05 C11.1@-11.85,-23.1
VCC_SENSE: C3.2 DD1.8 R1.1 R2.2 | length 8.9
  Top w0.15: -6.9,-24.3 -6.75,-24.15 -6.75,-23.35 -6.85,-23.25 DD1.8@-6.85,-22.65
  Top w0.2: -12.15,-24.5 -12.15,-24.85 -12.2,-24.9 -12.2,-25.3 -11.2,-25.3 -11.2,-24.9 -11,-24.7 -9.6,-24.7 -9.2,-25.1 -7.7,-25.1 -6.9,-24.3
~CS: R11.1 R33.2 TP9.1 VD2.3 VD2.4 X1.9 | length 20
  INNER_TOP w0.15: -2.25,-26.05 -0.6,-24.4 -0.6,-18.1 ccw(c-0.8,-18.1) -0.8,-17.9 -1.1,-17.9 cw(c-1.1,-17.7) -1.3,-17.7 cw(c-1.1,-17.7) -1.1,-17.5 -0.8,-17.5 ccw(c-0.8,-17.3) -0.6,-17.3 ccw(c-0.8,-17.3) -0.8,-17.1 -1.3,-17.1 cw(c-1.3,-16.9) -1.5,-16.9 cw(c-1.3,-16.9) -1.3,-16.7 -0.8,-16.7 ccw(c-0.8,-16.5) -0.6,-16.5 ccw(c-0.8,-16.5) -0.8,-16.3 -1.2,-16.3 cw(c-1.2,-16.1) -1.4,-16.1 cw(c-1.2,-16.1) -1.2,-15.9 -0.8,-15.9 ccw(c-0.8,-15.7) -0.6,-15.7 ccw(c-0.8,-15.7) -0.8,-15.5 -1.117,-15.5 ccw(c-1.117,-16.183) -1.6,-15.7 ccw(c-0.996,-16.304) -1.85,-16.304 v1(-1.85,-17.25)
  Bottom w0.2: v1(-1.85,-17.25) -0.95,-17.25 R11.1@-0.9,-17.2 R33.2@-0.9,-17.9
  Bottom w0.4: VD2.3@-2.55,-17.25 v1(-1.85,-17.25)
~CS_R: DD1.20 R33.1 | length 3
  Top w0.2: v1(-1.8,-19.9) -1.8,-19.4 -1.55,-19.15 DD1.20@-0.85,-19.15
  Bottom w0.2: v1(-1.8,-19.9) -1.6,-19.9 -0.9,-19.2 R33.1@-0.9,-18.9
~SPI_INT: R36.1 R37.1 TP10.1 X1.5 | length 13.6
  INNER_TOP w0.15: v1(-9,-16) -9,-19 -8.1,-19.9 -8.1,-25 -7.4,-25.7 -5.4,-25.7 -5.1,-26
  Bottom w0.2: R36.1@-9.4,-16 v1(-9,-16) R37.1@-8.6,-16
~SPI_INT_R: DD1.54 R36.2 | length 2.1
  Top w0.2: DD1.54@-12.35,-15.65 v1(-11.5,-15.65)
  Bottom w0.2: v1(-11.5,-15.65) -11.05,-15.65 -10.7,-16 R36.2@-10.4,-16
pads on no net: DD1.22 DD1.42 DD1.43 DD2.0 X1.14 X1.15 X1.16 X1.17 X1.24 X1.25 X1.26 X1.27 X1.28 X1.35 X1.36 X1.37 X1.38 X1.39 X1.40 X1.41 X1.42 X1.43 X1.44 X1.45 X1.46 X1.47 X1.48 X1.49 X1.50 X1.51 X1.52 X1.53 X1.54 X1.55 X1.56 X1.57 X1.58 X1.67 X1.68 X1.69 X1.70 X1.71 X1.72 X1.73 X1.74 X1.75
copper on no net: | length 3.6
  Bottom w0.2: -6.5,-11.5 -4.6,-11.5 -4.35,-11.75 -4.35,-13 -4.25,-13.1

## Polygon pours and split planes (outlines as drawn)
PS_IN on POWER "PS_IN_L02_P000" (solid, pour order 0): -81.6,32.7 -81.4,32.5 -80,32.5 -78,34.5 -70.9,34.5 -68.6,36.8 -68.6,37.9 -70,37.9 -70,37.5 -71.5,36 -78.6,36 -80.4,34.2 -81.6,34.2
+3V3MCU on POWER "+3V3MCU_L02_P027" (solid, remove dead copper, pour order 27): -90,55 -90,36 -80,36 -74,42 -74,55
+3V3 on POWER "POWER-+3V3" (solid, remove dead copper, pour order 40): -78.9,23 -58.9,23 -58.9,55 -72.9,55 -72.9,42 -78.9,36
5V_EXT on POWER "5V_EXT_L02_P035" (solid, remove dead copper, pour order 35): -81,35 -91,35 -91,23 -80,23 -80,34
GND on GROUND "GROUND-GND" (solid, remove dead copper, pour order 28): 21.3,2.791 52.3,2.791 52.3,34.791 21.3,34.791
MCU_OSC_OUT on Bottom "MCU_OSC_OUT_L06_P003" (solid, pour order 3): -8.2,-20.7 -6.8,-20.7 -6.8,-21.4 -7.1,-21.7 -8.2,-21.7
+3V3MCU on Bottom "+3V3MCU_L06_P004" (solid, pour order 4): -12.7,-22.1 -12.6,-22 -11.6,-22 -11.4,-22.2 -11.4,-23.7 -12.1,-23.7 -12.1,-23 -12.7,-22.4
1V0 on Bottom "1V0_L06_P016" (solid, pour order 16): 12.3,-9.6 12.1,-9.4 11.9,-9.4 11.9,-8.3 12.2,-8.3 12.8,-8.9 12.8,-9 12.8,-10.2 12.3,-10.2
GND on Bottom "GND_L06_P020" (solid, pour order 20): 9.4,-5.1 9.2,-4.9 9.2,-4.4 10.3,-4.4 10.3,-4.9 10.1,-5.1
+3V3 on Top "+3V3_L01_P041" (solid, pour order 41): 10.5,-13.2 10.5,-13.9 10.6,-14 11.8,-14 11.8,-13.5 11,-13.5 10.7,-13.2

## Other copper
Top:
  region net GND: 1,-2.5 cw(c5.914,-7.535) 6,-0.5 6,0 1,0
  region net GND: -1,-2.5 ccw(c-5.914,-7.535) -6,-0.5 -6,0 -1,0
Bottom:
  region net GND: -1,-3.5 ccw(c-7.121,-8.035) -6,-0.5 -6,0 -1,0
  region net GND: 1,-3.5 cw(c7.121,-8.035) 6,-0.5 6,0 1,0
Multi-Layer:
  region net GND: -15,0 -15,-1.2 -14.5,-1.2 -13.8,-0.5 13.8,-0.5 14.5,-1.2 15,-1.2 15,0
  pour cut-out: -56.2,16.3 ccw(c-54.7,16.3) -54.7,14.8 ccw(c-54.7,16.3) -53.2,16.3 ccw(c-54.7,16.3) -54.7,17.8 ccw(c-54.7,16.3)
  lines w0.4 net +3V3: -4.6,-26.1 -4.2,-26.1 ; 5.75,-13.4 6.15,-13.4 ; 10.2,-13.8 11.4,-13.8
  lines w0.4 net +3V3MCU: -12.5,-22.2 -11.7,-22.2
  lines w0.4 net GND: -13.45,-23.95 -13.25,-23.95 -13.05,-23.95 ; 9.35,-4.9 9.8,-4.9 10.15,-4.9 ; 11.2,-11.2 12,-11.2 ; 12,-11.2 12,-11.2
  lines w0.4 net SPE_VDDA: 9.8,-10.8 9.8,-10.7 9.8,-10.4

## Silkscreen, mask and mechanical layers (free items; w line width, h text height)
Top Overlay:
  drawing of 20 lines, arcs and shapes, not listed
  text "АО «НПО «КИС»" at 28.5,-12.9 h0.8
  text "УМС v 1.0" at 35.8,-12.9 h0.8
Bottom Overlay:
  drawing of 15 lines, arcs and shapes, not listed
  text "КРИТИЧЕСКИЕ / ИНФОРМАЦИОННЫЕ / СИСТЕМЫ /  / РОСАТОМ" at -63.2,8.1 h1
  text "АО «НПО «КИС»" at -71.7,0.9 h0.8
  text "УМС v 1.0" at -65.6,0.9 h0.8
Top Solder Mask:
  region: -1,-2.5 ccw(c-5.914,-7.535) -6,-0.5 -6,0 -1,0
  region: 1,-2.5 cw(c5.914,-7.535) 6,-0.5 6,0 1,0
  region: -15,0 -15,-0.5 15,-0.5 15,0
  region: -11,-27 -11,-31 11,-31 11,-27
Bottom Solder Mask:
  region: -1,-3.5 ccw(c-7.121,-8.035) -6,-0.5 -6,0 -1,0
  region: 1,-3.5 cw(c7.121,-8.035) 6,-0.5 6,0 1,0
  region: -15,0 -15,-0.5 15,-0.5 15,0
  region: -11,-27 -11,-31 11,-31 11,-27
Mechanical 13:
  lines w0.1: -3,0 -3,-6 3,-6 3,0
Mechanical 15:
  the board outline again, w0.1